# Altium PCB Hydrophones_Front_Plane_1.PcbDoc
Units mm, origin at the board's own origin, x right, y up, seen from the top; angles counter-clockwise.
Board outline 128 x 128 mm, 2 copper layers (Top Layer, Bottom Layer); 45 components, 37 nets, 198 pads, 0 vias.
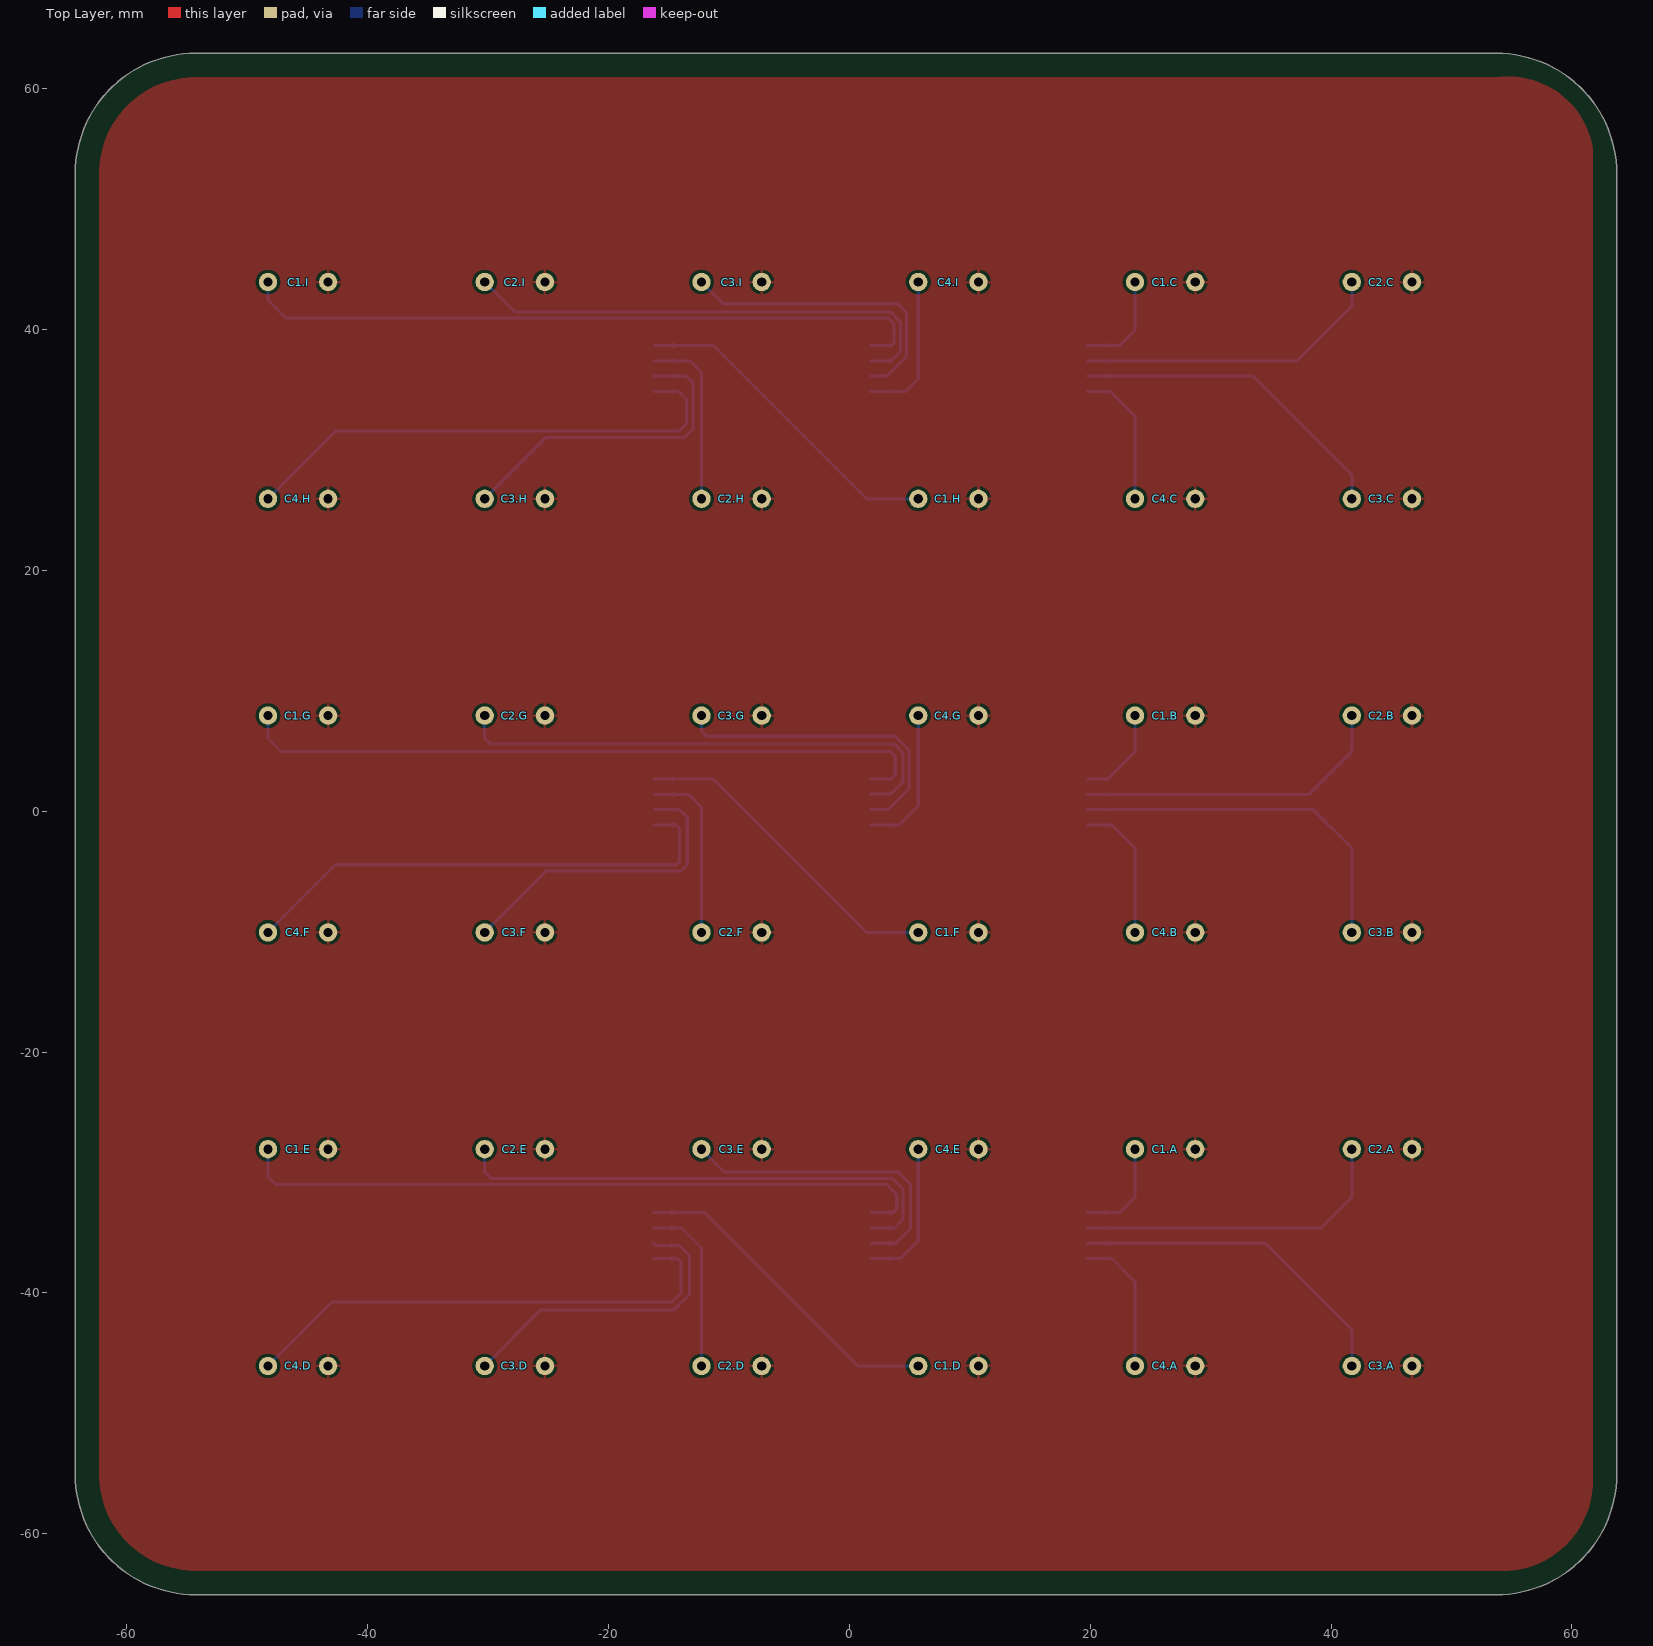
[diagram p0: Top Layer view]
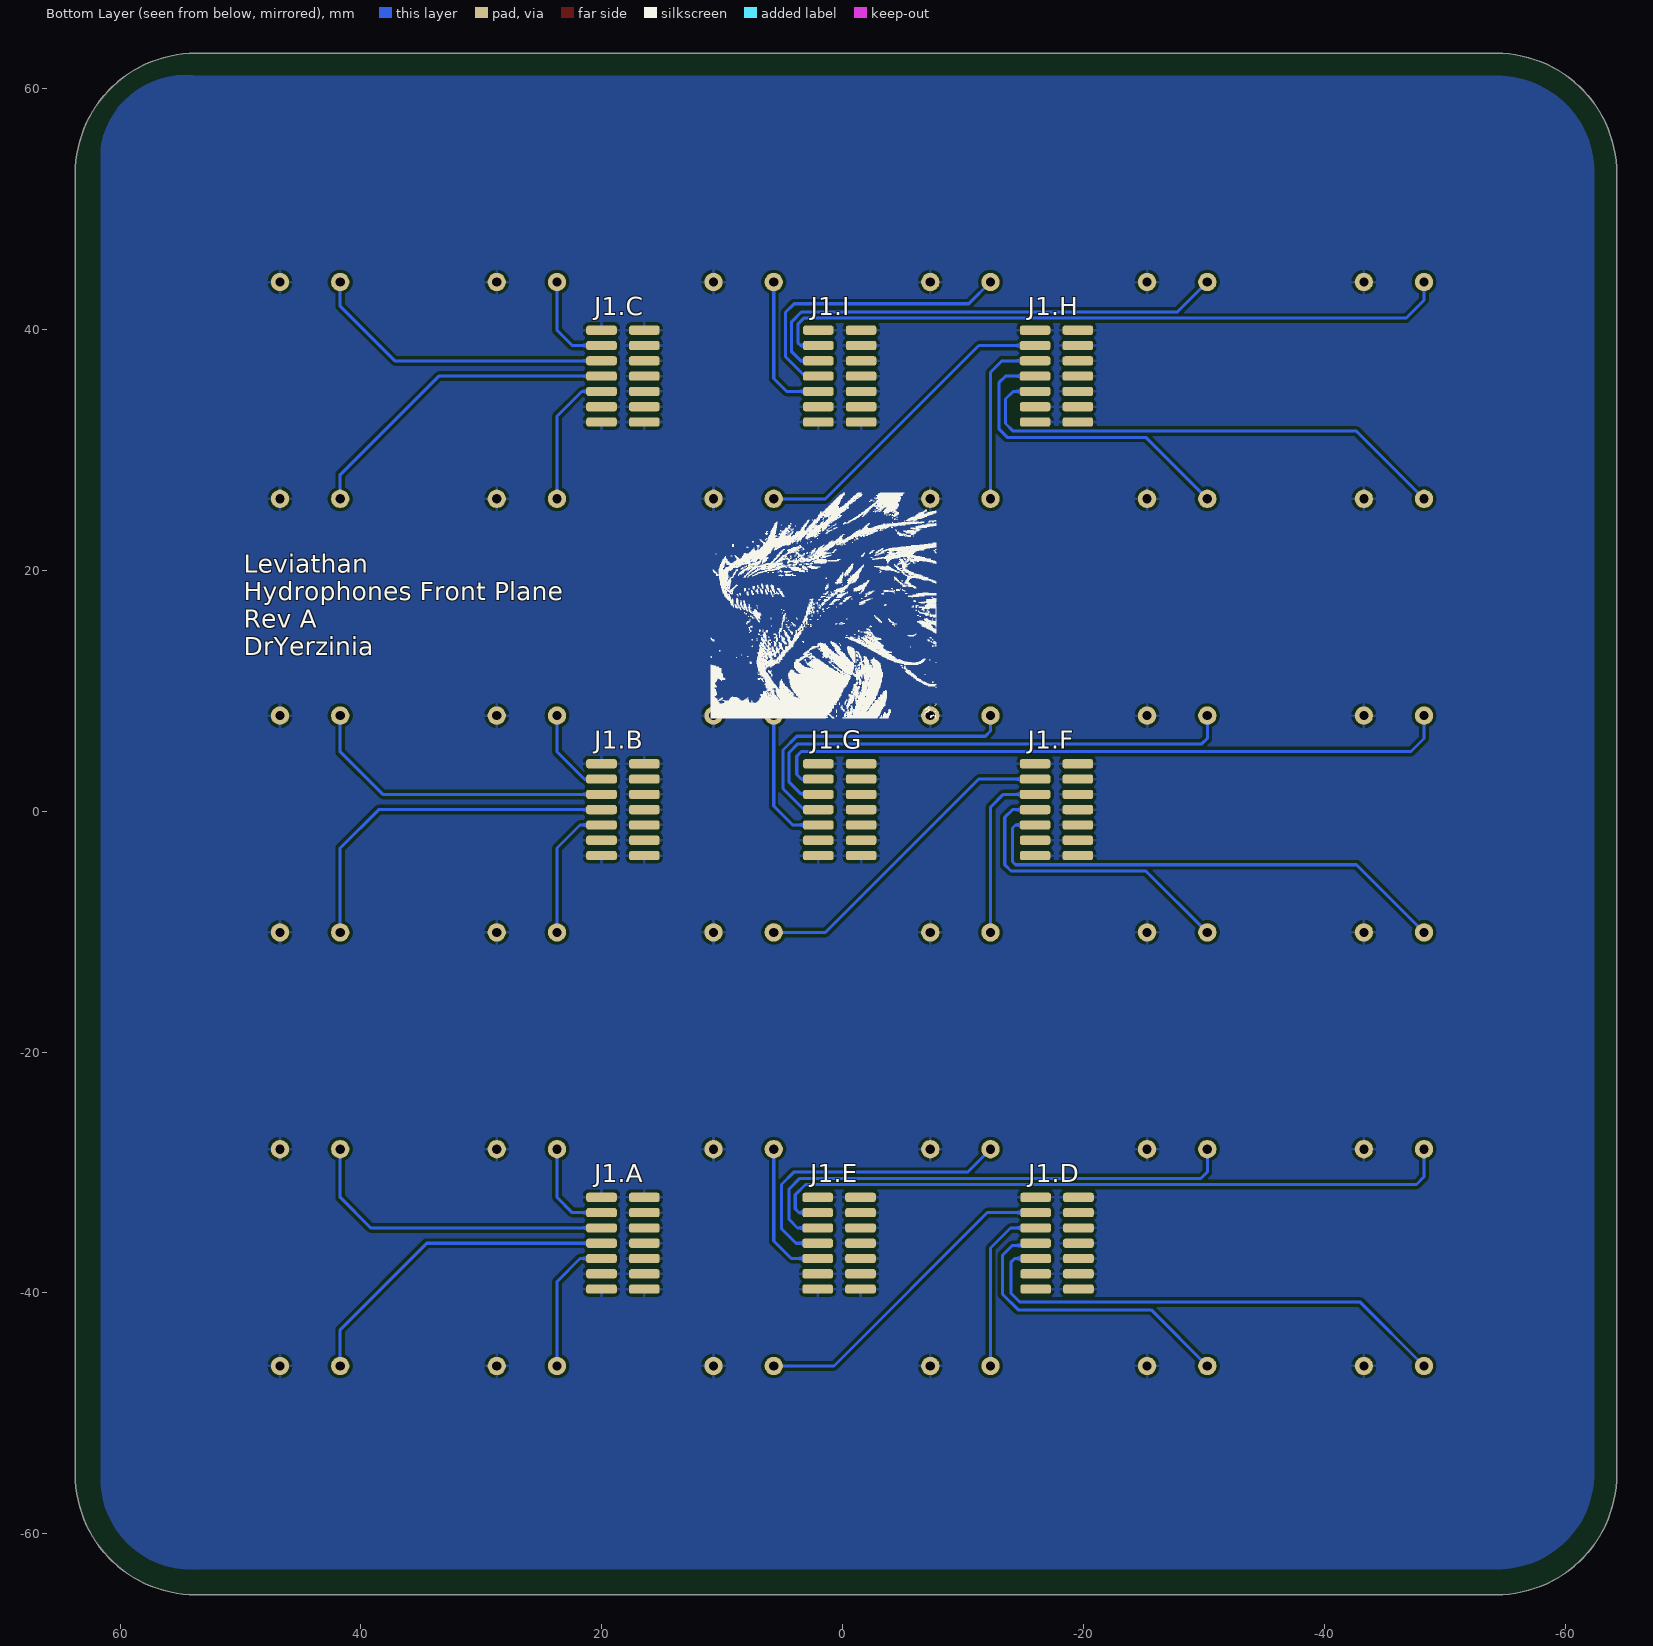
[diagram p1: Bottom Layer view, seen from below]
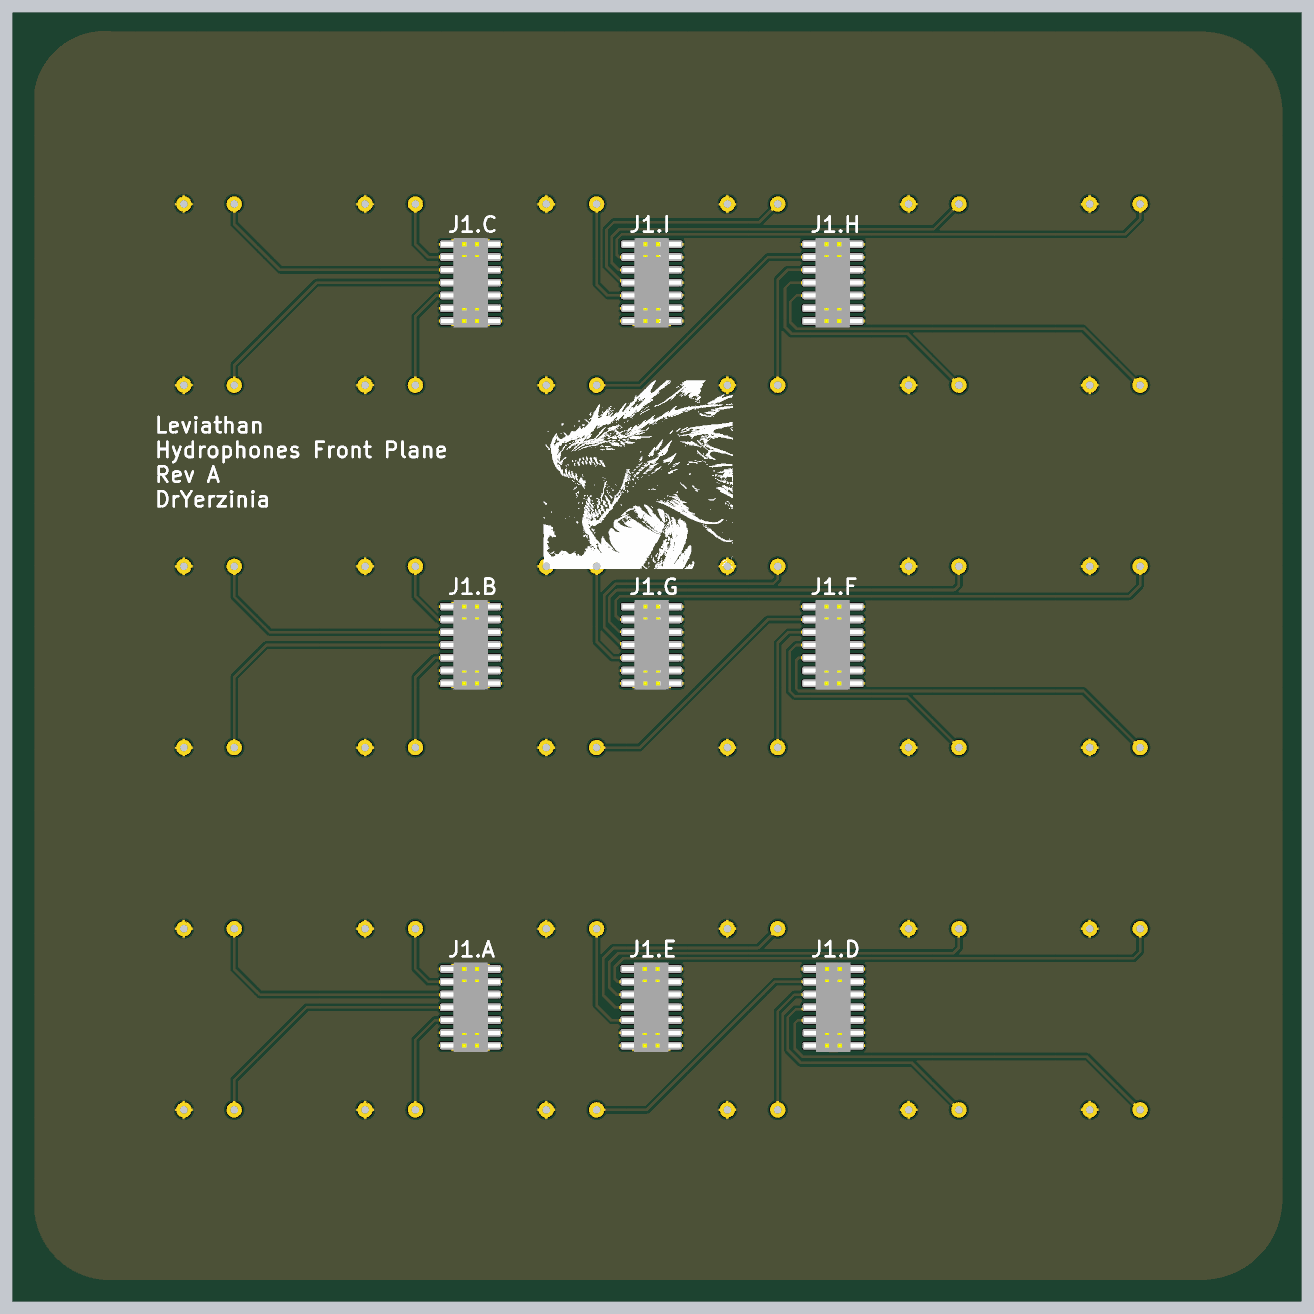
[diagram p2: 3D render of the assembled board from below, using the file's embedded part models]

## Layer stack, top to bottom
Top Solder: solder mask 0.0102, Solder Resist, Dk 3.5
Top Layer: signal copper 0.0356
Dielectric 1: dielectric 0.32, FR-4, Dk 4.8
Bottom Layer: signal copper 0.0356
Bottom Solder: solder mask 0.0102, Solder Resist, Dk 3.5

## Board outline
-64.279,-55.063 ccw(c-54.279,-55.063) -54.279,-65.063 53.721,-65.063 ccw(c53.721,-55.063) 63.721,-55.063 63.721,52.937 ccw(c53.721,52.937) 53.721,62.937 -54.279,62.937 ccw(c-54.279,52.937) -64.279,52.937

## Design rules (kind name [scope] priority, off if disabled: settings)
Clearance [All] p1: gap=0.254 ignorepadtopadclearanceinfootprint=FALSE except(0: Arc-Hole Track-Hole SMDPad-Hole THPad-Hole Via-Hole Fill-Hole Poly-Hole Region-Hole Text-Hole)
PolygonConnect [All] p1: connectstyle=Relief reliefconductorwidth=0.254 reliefentries=4 polygonreliefangle="90 Angle" airgapwidth=0.254
RoutingVias [All] p1: holewidth=0.711 width=1.27 viastyle="Through Hole" minholewidth=0.711 minwidth=1.27 maxholewidth=0.711 maxwidth=1.27
SolderMaskExpansion [All] p1: expansion=0.102
Width [All] p1: maxlimit=0.254 minlimit=0.254 preferedwidth=0.254
30 further rules are at their usual default settings.

## Classes and differential pairs
channel class Tranducer_Channel: CH1 CH2 CH3 CH4 CH5 CH6 CH7 CH8 CH9
component class CH9: C1.I C2.I C3.I C4.I J1.I
component class CH8: C1.H C2.H C3.H C4.H J1.H
component class CH7: C1.G C2.G C3.G C4.G J1.G
component class CH6: C1.F C2.F C3.F C4.F J1.F
component class CH5: C1.E C2.E C3.E C4.E J1.E
component class CH4: C1.D C2.D C3.D C4.D J1.D
component class CH3: C1.C C2.C C3.C C4.C J1.C
component class CH2: C1.B C2.B C3.B C4.B J1.B
component class CH1: C1.A C2.A C3.A C4.A J1.A

## Components (designator, comment, footprint, x,y, rotation, side; value= is the part's Value field where it differs from the comment)
C1.A "Transducer" TRANSDUCER 26.721,-28.063 r0 top (schematic designator C1)
C1.B "Transducer" TRANSDUCER 26.721,7.937 r0 top (schematic designator C1)
C1.C "Transducer" TRANSDUCER 26.721,43.937 r0 top (schematic designator C1)
C1.D "Transducer" TRANSDUCER 8.721,-46.063 r0 top (schematic designator C1)
C1.E "Transducer" TRANSDUCER -45.279,-28.063 r0 top (schematic designator C1)
C1.F "Transducer" TRANSDUCER 8.721,-10.063 r0 top (schematic designator C1)
C1.G "Transducer" TRANSDUCER -45.279,7.937 r0 top (schematic designator C1)
C1.H "Transducer" TRANSDUCER 8.721,25.937 r0 top (schematic designator C1)
C1.I "Transducer" TRANSDUCER -45.279,43.937 r0 top (schematic designator C1)
C2.A "Transducer" TRANSDUCER 44.721,-28.063 r0 top (schematic designator C2)
C2.B "Transducer" TRANSDUCER 44.721,7.937 r0 top (schematic designator C2)
C2.C "Transducer" TRANSDUCER 44.721,43.937 r0 top (schematic designator C2)
C2.D "Transducer" TRANSDUCER -9.279,-46.063 r0 top (schematic designator C2)
C2.E "Transducer" TRANSDUCER -27.279,-28.063 r0 top (schematic designator C2)
C2.F "Transducer" TRANSDUCER -9.279,-10.063 r0 top (schematic designator C2)
C2.G "Transducer" TRANSDUCER -27.279,7.937 r0 top (schematic designator C2)
C2.H "Transducer" TRANSDUCER -9.279,25.937 r0 top (schematic designator C2)
C2.I "Transducer" TRANSDUCER -27.279,43.937 r0 top (schematic designator C2)
C3.A "Transducer" TRANSDUCER 44.721,-46.063 r0 top (schematic designator C3)
C3.B "Transducer" TRANSDUCER 44.721,-10.063 r0 top (schematic designator C3)
C3.C "Transducer" TRANSDUCER 44.721,25.937 r0 top (schematic designator C3)
C3.D "Transducer" TRANSDUCER -27.279,-46.063 r0 top (schematic designator C3)
C3.E "Transducer" TRANSDUCER -9.279,-28.063 r0 top (schematic designator C3)
C3.F "Transducer" TRANSDUCER -27.279,-10.063 r0 top (schematic designator C3)
C3.G "Transducer" TRANSDUCER -9.279,7.937 r0 top (schematic designator C3)
C3.H "Transducer" TRANSDUCER -27.279,25.937 r0 top (schematic designator C3)
C3.I "Transducer" TRANSDUCER -9.279,43.937 r0 top (schematic designator C3)
C4.A "Transducer" TRANSDUCER 26.721,-46.063 r0 top (schematic designator C4)
C4.B "Transducer" TRANSDUCER 26.721,-10.063 r0 top (schematic designator C4)
C4.C "Transducer" TRANSDUCER 26.721,25.937 r0 top (schematic designator C4)
C4.D "Transducer" TRANSDUCER -45.279,-46.063 r0 top (schematic designator C4)
C4.E "Transducer" TRANSDUCER 8.721,-28.063 r0 top (schematic designator C4)
C4.F "Transducer" TRANSDUCER -45.279,-10.063 r0 top (schematic designator C4)
C4.G "Transducer" TRANSDUCER 8.721,7.937 r0 top (schematic designator C4)
C4.H "Transducer" TRANSDUCER -45.279,25.937 r0 top (schematic designator C4)
C4.I "Transducer" TRANSDUCER 8.721,43.937 r0 top (schematic designator C4)
J1.A "Header 7X2" CONN_14X2_0.5IN 18.245,-35.873 r90 bottom (schematic designator J1)
J1.B "Header 7X2" CONN_14X2_0.5IN 18.245,0.127 r90 bottom (schematic designator J1)
J1.C "Header 7X2" CONN_14X2_0.5IN 18.245,36.127 r90 bottom (schematic designator J1)
J1.D "Header 7X2" CONN_14X2_0.5IN -17.803,-35.873 r90 bottom (schematic designator J1)
J1.E "Header 7X2" CONN_14X2_0.5IN 0.297,-35.873 r90 bottom (schematic designator J1)
J1.F "Header 7X2" CONN_14X2_0.5IN -17.755,0.127 r90 bottom (schematic designator J1)
J1.G "Header 7X2" CONN_14X2_0.5IN 0.245,0.127 r90 bottom (schematic designator J1)
J1.H "Header 7X2" CONN_14X2_0.5IN -17.755,36.127 r90 bottom (schematic designator J1)
J1.I "Header 7X2" CONN_14X2_0.5IN 0.245,36.127 r90 bottom (schematic designator J1)

## Footprints (in the part's own frame and the unit in brackets; to place one, negate y for a bottom-side part, rotate by r counter-clockwise, add the part's x,y. Pads: shape width x height; smd on the part's side, far side on the other; paste and mask are expansions set on the pad)
CONN_14X2_0.5IN [mil]
  rrect50% 30x100 smd: 1(150,70) 2(150,-70) 3(100,70) 4(100,-70) 5(50,70) 6(50,-70) 7(0,70) 8(0,-70) 9(-50,70) 10(-50,-70) 11(-100,70) 12(-100,-70) 13(-150,70) 14(-150,-70)
  body extent -175,-115 175,115, height 274
TRANSDUCER [mil]
  round 60 hole 30: 1(-118.11,0) 2(78.74,0)
  body extent -197,-197 197,197, height 354

## Part data
J1.A J1.B J1.C J1.D J1.E J1.F J1.G J1.H J1.I: "Header, 7-Pin, Dual row", LatestRevisionDate=17-Jul-2002, LatestRevisionNote="Re-released for DXP Platform.", Publisher="Altium Limited", System=Connector

## Nets (pads, with @x,y where several pads share a name; then routed paths per layer and width w, separated by ;. In a path a pad name is that pad's centre, name@x,y a point inside that pad or via, vN(x,y) a via of type N, cw(c..) or ccw(c..) an arc to the next point about the centre after c; other vN are vias at no path point)
GND.A: C1.A.2 C1.B.2 C1.C.2 C1.D.2 C1.E.2 C1.F.2 C1.G.2 C1.H.2 C1.I.2 C2.A.2 C2.B.2 C2.C.2 C2.D.2 C2.E.2 C2.F.2 C2.G.2 C2.H.2 C2.I.2 C3.A.2 C3.B.2 C3.C.2 C3.D.2 C3.E.2 C3.F.2 C3.G.2 C3.H.2 C3.I.2 C4.A.2 C4.B.2 C4.C.2 C4.D.2 C4.E.2 C4.F.2 C4.G.2 C4.H.2 C4.I.2 J1.A.1 J1.A.2 J1.A.4 J1.A.6 J1.A.8 J1.A.10 J1.A.11 J1.A.12 J1.A.13 J1.A.14 J1.B.1 J1.B.2 J1.B.4 J1.B.6 J1.B.8 J1.B.10 J1.B.11 J1.B.12 J1.B.13 J1.B.14 J1.C.1 J1.C.2 J1.C.4 J1.C.6 J1.C.8 J1.C.10 J1.C.11 J1.C.12 J1.C.13 J1.C.14 J1.D.1 J1.D.2 J1.D.4 J1.D.6 J1.D.8 J1.D.10 J1.D.11 J1.D.12 J1.D.13 J1.D.14 J1.E.1 J1.E.2 J1.E.4 J1.E.6 J1.E.8 J1.E.10 J1.E.11 J1.E.12 J1.E.13 J1.E.14 J1.F.1 J1.F.2 J1.F.4 J1.F.6 J1.F.8 J1.F.10 J1.F.11 J1.F.12 J1.F.13 J1.F.14 J1.G.1 J1.G.2 J1.G.4 J1.G.6 J1.G.8 J1.G.10 J1.G.11 J1.G.12 J1.G.13 J1.G.14 J1.H.1 J1.H.2 J1.H.4 J1.H.6 J1.H.8 J1.H.10 J1.H.11 J1.H.12 J1.H.13 J1.H.14 J1.I.1 J1.I.2 J1.I.4 J1.I.6 J1.I.8 J1.I.10 J1.I.11 J1.I.12 J1.I.13 J1.I.14
NetC1.A_1: C1.A.1 J1.A.3 | length 8.5
  Bottom Layer w0.254: J1.A.3@19.769,-33.333 22.451,-33.333 23.721,-32.063 C1.A.1
NetC1.B_1: C1.B.1 J1.B.3 | length 7.9
  Bottom Layer w0.254: J1.B.3@19.769,2.667 21.451,2.667 23.721,4.937 C1.B.1
NetC1.C_1: C1.C.1 J1.C.3 | length 8.5
  Bottom Layer w0.254: J1.C.3@19.769,38.667 22.451,38.667 23.721,39.937 C1.C.1
NetC1.D_1: C1.D.1 J1.D.3 | length 27.3
  Bottom Layer w0.254: J1.D.3@-16.279,-33.333 -16.271,-33.325 -12.017,-33.325 0.721,-46.063 C1.D.1
NetC1.E_1: C1.E.1 J1.E.3 | length 58.5
  Bottom Layer w0.254: C1.E.1 -48.279,-30.363 -47.649,-30.993 3.084,-30.993 3.937,-31.846 3.937,-33.02 3.624,-33.333 J1.E.3 J1.E.3@1.821,-33.333
NetC1.F_1: C1.F.1 J1.F.3 | length 27.2
  Bottom Layer w0.254: J1.F.3@-16.231,2.667 -11.309,2.667 1.421,-10.063 C1.F.1
NetC1.G_1: C1.G.1 J1.G.3 | length 58.3
  Bottom Layer w0.254: C1.G.1 -48.279,6.037 -47.195,4.953 3.429,4.953 3.81,4.572 3.81,3.048 3.429,2.667 J1.G.3 J1.G.3@1.769,2.667
NetC1.H_1: C1.H.1 J1.H.3 | length 27.2
  Bottom Layer w0.254: J1.H.3@-16.231,38.667 -11.309,38.667 1.421,25.937 C1.H.1
NetC1.I_1: C1.I.1 J1.I.3 | length 57.9
  Bottom Layer w0.254: C1.I.1 -48.279,42.437 -46.779,40.937 3.221,40.937 3.721,40.437 3.721,38.9 3.488,38.667 J1.I.3 J1.I.3@1.769,38.667
NetC2.A_1: C2.A.1 J1.A.5 | length 27
  Bottom Layer w0.254: J1.A.5@19.769,-34.603 39.181,-34.603 41.721,-32.063 C2.A.1
NetC2.B_1: C2.B.1 J1.B.5 | length 26.4
  Bottom Layer w0.254: J1.B.5@19.769,1.397 38.181,1.397 41.721,4.937 C2.B.1
NetC2.C_1: C2.C.1 J1.C.5 | length 25.8
  Bottom Layer w0.254: J1.C.5@19.769,37.397 37.181,37.397 41.721,41.937 C2.C.1
NetC2.D_1: C2.D.1 J1.D.5 | length 14.5
  Bottom Layer w0.254: J1.D.5@-16.279,-34.603 -13.939,-34.603 -12.279,-36.263 C2.D.1
NetC2.E_1: C2.E.1 J1.E.5 | length 42.7
  Bottom Layer w0.254: C2.E.1 -30.279,-29.963 -29.757,-30.485 3.556,-30.485 4.445,-31.374 4.445,-33.909 3.751,-34.603 J1.E.5 J1.E.5@1.821,-34.603
NetC2.F_1: C2.F.1 J1.F.5 | length 14.8
  Bottom Layer w0.254: J1.F.5@-16.231,1.397 -13.339,1.397 -12.279,0.337 C2.F.1
NetC2.G_1: C2.G.1 J1.G.5 | length 42.7
  Bottom Layer w0.254: C2.G.1 -30.279,6.037 -29.83,5.588 3.727,5.588 4.445,4.87 4.445,2.413 3.469,1.437 1.809,1.437 J1.G.5@1.769,1.397
NetC2.H_1: C2.H.1 J1.H.5 | length 14.8
  Bottom Layer w0.254: J1.H.5@-16.231,37.397 -13.239,37.397 -12.279,36.437 C2.H.1
NetC2.I_1: C2.I.1 J1.I.5 | length 41.1
  Bottom Layer w0.254: C2.I.1 -27.787,41.445 3.432,41.445 4.229,40.647 4.229,38.138 3.488,37.397 J1.I.5 J1.I.5@1.769,37.397
NetC3.A_1: C3.A.1 J1.A.7 | length 27.9
  Bottom Layer w0.254: J1.A.7@19.769,-35.873 34.531,-35.873 41.721,-43.063 C3.A.1
NetC3.B_1: C3.B.1 J1.B.7 | length 30.3
  Bottom Layer w0.254: J1.B.7@19.769,0.127 38.531,0.127 41.721,-3.063 C3.B.1
NetC3.C_1: C3.C.1 J1.C.7 | length 27.3
  Bottom Layer w0.254: J1.C.7@19.769,36.127 33.531,36.127 41.721,27.937 C3.C.1
NetC3.D_1: C3.D.1 J1.D.7 | length 26.1
  Bottom Layer w0.254: C3.D.1 -25.618,-41.402 -14.574,-41.402 -13.279,-40.107 -13.279,-36.863 -14.079,-36.063 -16.089,-36.063 J1.D.7@-16.279,-35.873
NetC3.E_1: C3.E.1 J1.E.7 | length 26
  Bottom Layer w0.254: C3.E.1 -10.365,-29.977 4.064,-29.977 5.08,-30.993 5.08,-34.671 3.878,-35.873 J1.E.7 J1.E.7@1.821,-35.873
NetC3.F_1: C3.F.1 J1.F.7 | length 26.1
  Bottom Layer w0.254: C3.F.1 -25.179,-4.963 -13.98,-4.963 -13.462,-4.445 -13.462,-0.508 -14.097,0.127 J1.F.7 J1.F.7@-16.231,0.127
NetC3.G_1: C3.G.1 J1.G.7 | length 26.3
  Bottom Layer w0.254: C3.G.1 -12.279,6.653 -11.849,6.223 3.81,6.223 4.953,5.08 4.953,1.869 3.211,0.127 J1.G.7 J1.G.7@1.769,0.127
NetC3.H_1: C3.H.1 J1.H.7 | length 27
  Bottom Layer w0.254: C3.H.1 -25.169,31.047 -13.657,31.047 -13,31.704 -13,35.606 -13.521,36.127 J1.H.7 J1.H.7@-16.231,36.127
NetC3.I_1: C3.I.1 J1.I.7 | length 25.4
  Bottom Layer w0.254: C3.I.1 -10.479,42.137 4.021,42.137 4.737,41.421 4.737,37.735 3.13,36.127 J1.I.7@1.769,36.127
NetC4.A_1: C4.A.1 J1.A.9 | length 11.7
  Bottom Layer w0.254: J1.A.9@19.769,-37.143 21.801,-37.143 23.721,-39.063 C4.A.1
NetC4.B_1: C4.B.1 J1.B.9 | length 11.7
  Bottom Layer w0.254: J1.B.9@19.769,-1.143 21.801,-1.143 23.721,-3.063 C4.B.1
NetC4.C_1: C4.C.1 J1.C.9 | length 11.7
  Bottom Layer w0.254: J1.C.9@19.769,34.857 J1.C.9 21.658,34.857 23.721,32.794 C4.C.1
NetC4.D_1: C4.D.1 J1.D.9 | length 41.8
  Bottom Layer w0.254: C4.D.1 -42.983,-40.767 -14.732,-40.767 -13.97,-40.005 -13.97,-37.465 -14.292,-37.143 J1.D.9 J1.D.9@-16.279,-37.143
NetC4.E_1: C4.E.1 J1.E.9 | length 12.1
  Bottom Layer w0.254: J1.E.9@1.821,-37.143 J1.E.9 4.259,-37.143 5.721,-35.681 C4.E.1
NetC4.F_1: C4.F.1 J1.F.9 | length 41.6
  Bottom Layer w0.254: C4.F.1 -42.661,-4.445 -14.351,-4.445 -14.097,-4.191 -14.097,-1.397 -14.351,-1.143 J1.F.9 J1.F.9@-16.231,-1.143
NetC4.G_1: C4.G.1 J1.G.9 | length 12.1
  Bottom Layer w0.254: J1.G.9@1.769,-1.143 4.141,-1.143 5.721,0.437 C4.G.1
NetC4.H_1: C4.H.1 J1.H.9 | length 42.3
  Bottom Layer w0.254: C4.H.1 -42.661,31.555 -14.165,31.555 -13.521,32.199 -13.521,34.222 -14.156,34.857 J1.H.9 J1.H.9@-16.231,34.857
NetC4.I_1: C4.I.1 J1.I.9 | length 12.4
  Bottom Layer w0.254: J1.I.9@1.769,34.857 4.641,34.857 5.721,35.937 C4.I.1

## Polygon pours and split planes (outlines as drawn)
GND.A on Top Layer "TOP_GND" (solid, pour order 0): -62.279,-55.063 ccw(c-54.279,-55.063) -54.279,-63.063 53.721,-63.063 ccw(c54.221,-55.563) 61.721,-56.063 61.721,54.937 ccw(c54.721,53.937) 53.721,60.937 -54.279,60.937 ccw(c-54.279,52.937) -62.279,52.937
GND.A on Bottom Layer "TOP_GND" (solid, pour order 2): -62.409,-54.945 ccw(c-54.409,-54.945) -54.409,-62.945 53.591,-62.945 ccw(c54.091,-55.445) 61.591,-55.945 61.591,55.055 ccw(c54.591,54.055) 53.591,61.055 -54.409,61.055 ccw(c-54.409,53.055) -62.409,53.055

## Silkscreen, mask and mechanical layers (free items; w line width, h text height)
Bottom Overlay:
  drawing of 4377 lines, arcs and shapes, not listed
  text "Leviathan / Hydrophones Front Plane / Rev A / DrYerzinia" at 49.721,12.937 h1.52
Top Solder:
  drawing of 269 lines, arcs and shapes, not listed
Mechanical 1:
  the board outline again, w0.254